# Altium PCB pcb_propeller.PcbDoc
Units mm, origin at the board's own origin, x right, y up, seen from the top; angles counter-clockwise.
Board outline 110 x 60 mm, 2 copper layers (Top Layer, Bottom Layer); 24 components, 32 nets, 115 pads, 0 vias.
Unrouted connection lines stored in the file: 2.
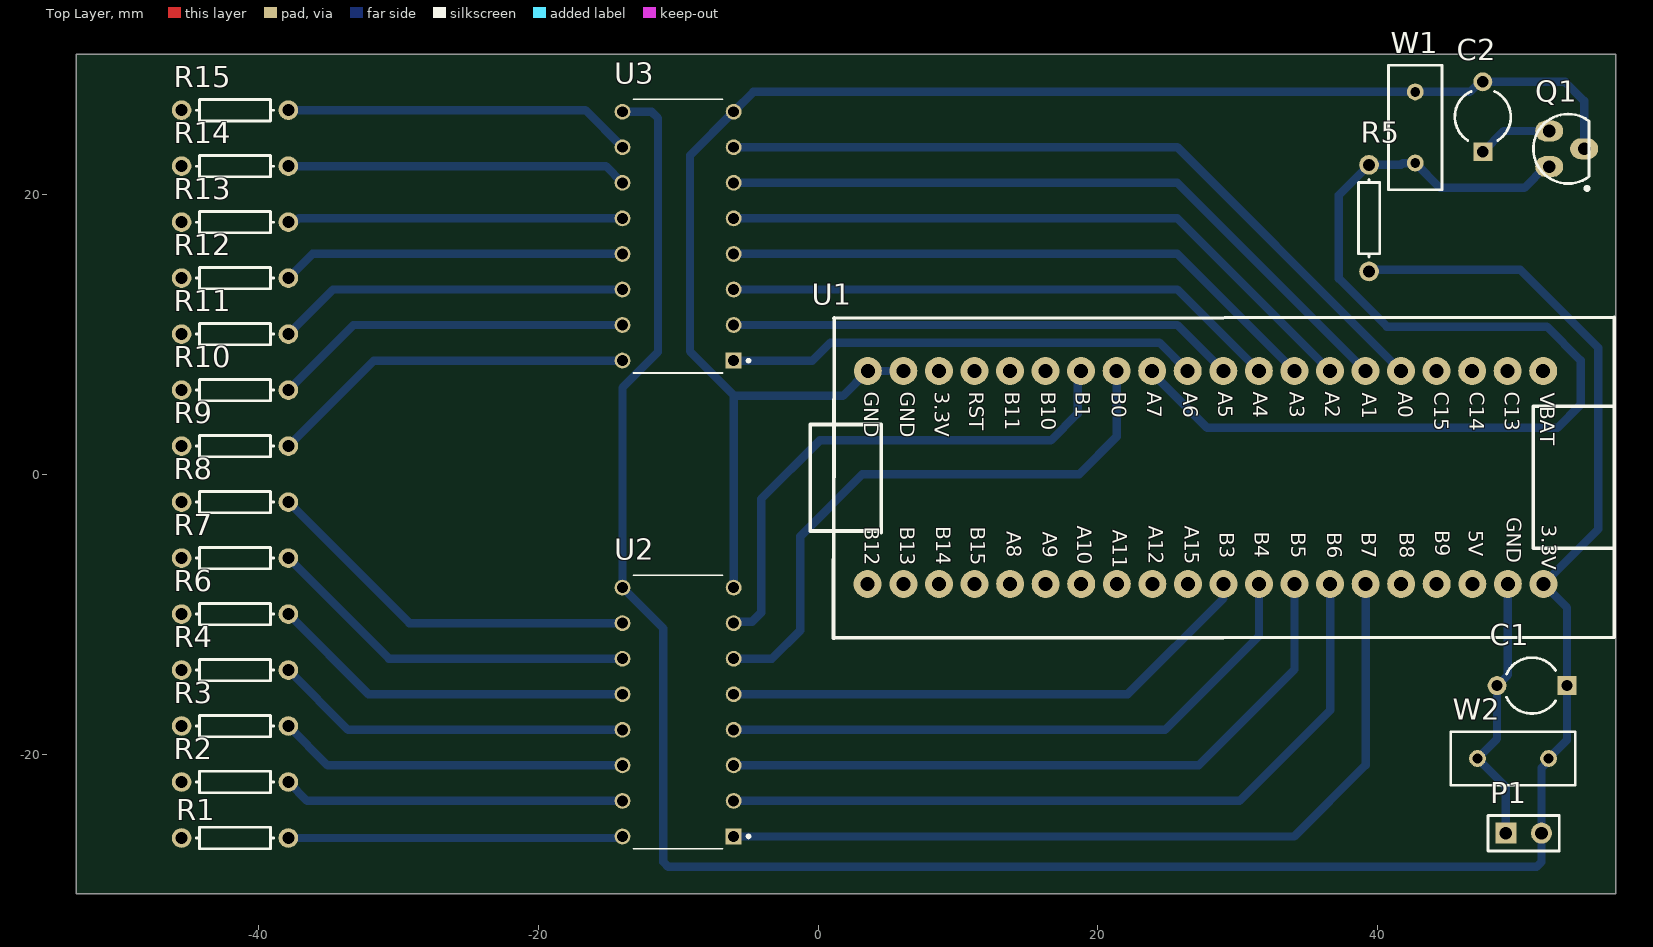
[diagram p0: Top Layer view]
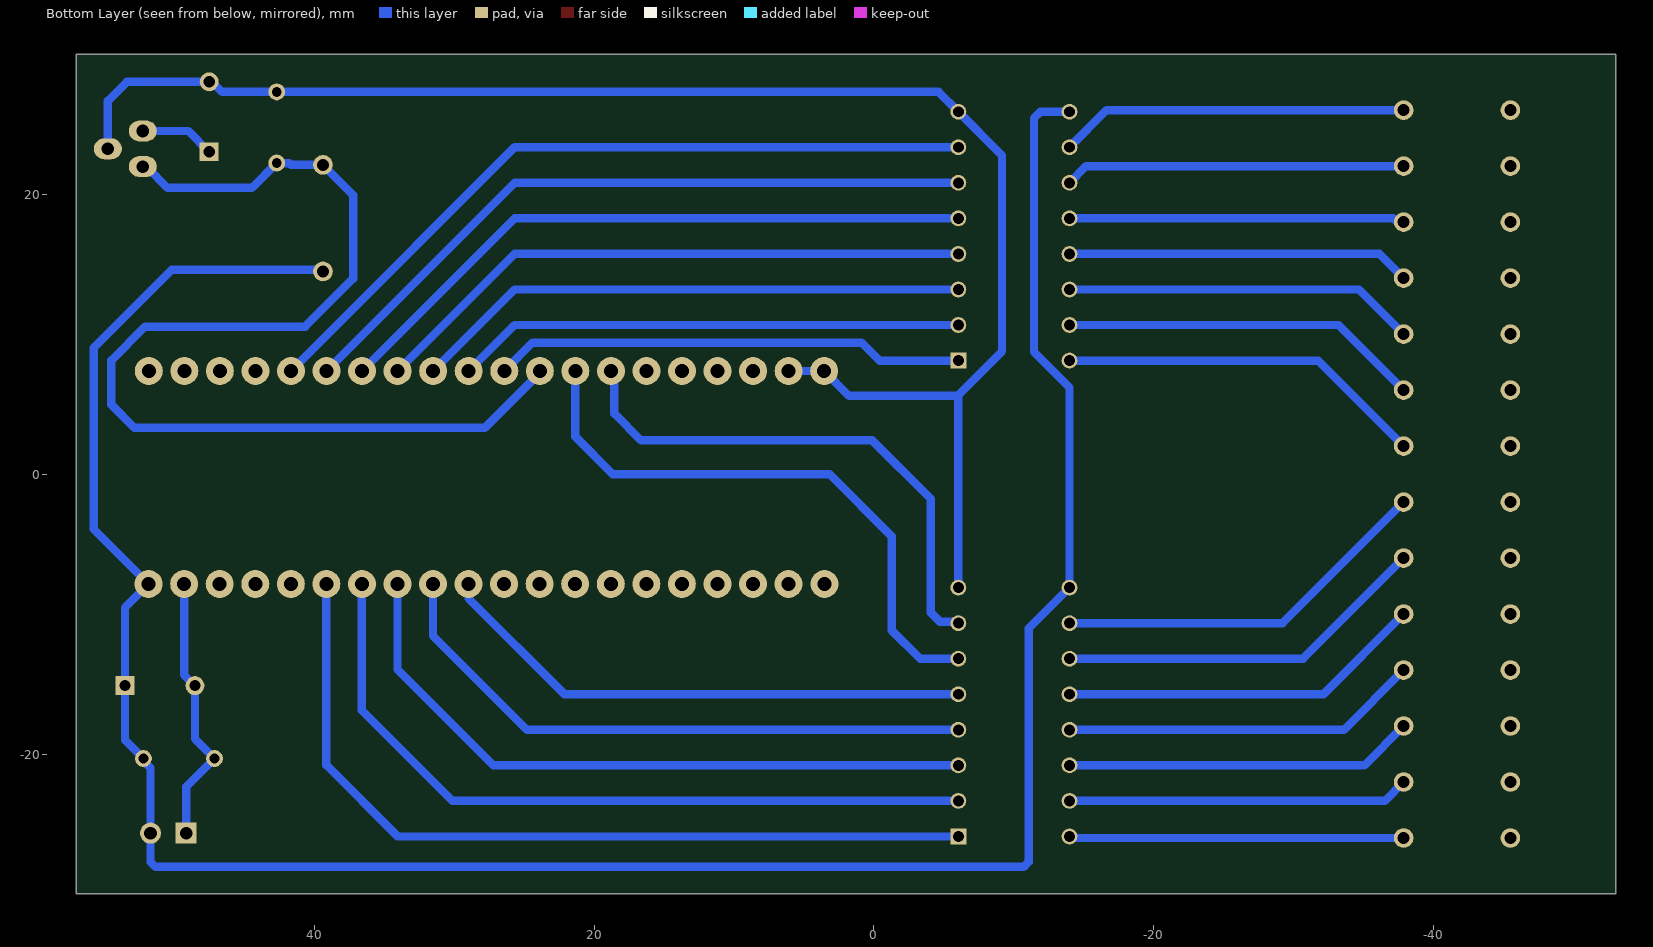
[diagram p1: Bottom Layer view, seen from below]

## Layer stack, top to bottom
Top Solder: solder mask 0.0102, Solder Resist, Dk 3.5
Top Layer: signal copper 0.0356
Dielectric 1: dielectric 0.32, FR-4, Dk 4.8
Bottom Layer: signal copper 0.0356
Bottom Solder: solder mask 0.0102, Solder Resist, Dk 3.5

## Board outline
-53,-30 -53,30 57,30 57,-30

## Design rules (kind name [scope] priority, off if disabled: settings)
Clearance [All] p1: gap=0.5 ignorepadtopadclearanceinfootprint=FALSE
PolygonConnect [All] p1: connectstyle=Relief reliefconductorwidth=0.254 reliefentries=4 polygonreliefangle="90 Angle" airgapwidth=0.254
RoutingVias [All] p1: holewidth=0.711 width=1.27 viastyle="Through Hole" minholewidth=0.711 minwidth=1.27 maxholewidth=0.711 maxwidth=1.27
SolderMaskExpansion [All] p1: expansion=0.102 istentingtop=FALSE
Width [All] p1: maxlimit=0.6 minlimit=0.6 preferedwidth=0.6
30 further rules are at their usual default settings.

## Components (designator, comment, footprint, x,y, rotation, side; value= is the part's Value field where it differs from the comment)
C1 "Cap2" CAPR5-4X5 51.014,-15.113 r180 top value=100nF
C2 "Cap2" CAPR5-4X5 47.498,25.527 r90 top value=100nF
P1 "Header 2" HDR1X2 49.149,-25.654 r0 top
Q1 "2N3904" TO-92A 53.594,23.241 r0 top
R1 "Res1" AXIAL-0.3 -41.656,-26 r180 top value=100
R2 "Res1" AXIAL-0.3 -41.656,-22 r180 top value=100
R3 "Res1" AXIAL-0.3 -41.656,-18 r180 top value=100
R4 "Res1" AXIAL-0.3 -41.656,-14 r180 top value=100
R5 "Res1" AXIAL-0.3 39.37,18.288 r270 top value=10K
R6 "Res1" AXIAL-0.3 -41.656,-10 r180 top value=100
R7 "Res1" AXIAL-0.3 -41.656,-6 r180 top value=100
R8 "Res1" AXIAL-0.3 -41.656,-2 r180 top value=100
R9 "Res1" AXIAL-0.3 -41.656,2 r180 top value=100
R10 "Res1" AXIAL-0.3 -41.656,6 r180 top value=100
R11 "Res1" AXIAL-0.3 -41.656,10 r180 top value=100
R12 "Res1" AXIAL-0.3 -41.656,14 r180 top value=100
R13 "Res1" AXIAL-0.3 -41.656,18 r180 top value=100
R14 "Res1" AXIAL-0.3 -41.656,22 r180 top value=100
R15 "Res1" AXIAL-0.3 -41.656,26 r180 top value=100
U1 "STM32F103C8T6" "Stm32 BluePill" 33.45,-0.02 r270 top
U2 "ULN2003ANE4" DIP794W45P254L1969H508Q16 -10,-17 r180 top
U3 "ULN2003ANE4" DIP794W45P254L1969H508Q16 -10,17 r180 top
W1 "Cap 10nF" RAD-0.2 42.672,24.765 r270 top
W2 "Jumper" RAD-0.2 49.657,-20.32 r0 top

## Footprints (in the part's own frame and the unit in brackets; to place one, negate y for a bottom-side part, rotate by r counter-clockwise, add the part's x,y. Pads: shape width x height; smd on the part's side, far side on the other; paste and mask are expansions set on the pad)
AXIAL-0.3 [mm] "Axial Device, Thru-Hole; 2 Leads; 0.3 in Pin Spacing"
  round 1.4 hole 0.85: 1(-3.81,0) 2(3.81,0)
  silkscreen extent -2.77,-0.76 2.77,0.76
CAPR5-4X5 [mm] "Capacitor; 2 Leads"
  rect 1.35x1.35 hole 0.8: 1(-2.5,0)
  round 1.35 hole 0.8: 2(2.5,0)
  silkscreen extent -1.69,-2 1.82,2
DIP794W45P254L1969H508Q16 [mm]
  rect 1.13x1.13 / inner round 1.13 / far side rect 1.13x1.13 hole 0.78 mask+0.102: 1(-3.97,8.89)
  round 1.13 hole 0.78 mask+0.102: 2(-3.97,6.35) 3(-3.97,3.81) 4(-3.97,1.27) 5(-3.97,-1.27) 6(-3.97,-3.81) 7(-3.97,-6.35) 8(-3.97,-8.89) 9(3.97,-8.89) 10(3.97,-6.35) 11(3.97,-3.81) 12(3.97,-1.27) 13(3.97,1.27) 14(3.97,3.81) 15(3.97,6.35) 16(3.97,8.89)
  silkscreen extent -5.13,-9.77 3.17,9.78, body extent -4.15,-9.65 4.15,9.65, height 5.08
HDR1X2 [mm] "Connector; Header; 2 Position"
  rect 1.5x1.5 hole 0.9: 1(0,0)
  round 1.5 hole 0.9: 2(2.54,0)
  silkscreen extent -1.27,-1.27 3.81,1.27
RAD-0.2 [mm] "Radial Cap, Thru-Hole; 2 Leads; 0.2 in Pin Spacing"
  round 1.2 hole 0.7: 1(-2.54,0) 2(2.54,0)
  silkscreen extent -4.44,-1.91 4.44,1.91
"Stm32 BluePill" [mm]
  round 2 hole 1: 1(7.828,-29.909) 2(7.828,-27.343) 3(7.828,-24.803) 4(7.828,-22.263) 5(7.828,-19.723) 6(7.828,-17.183) 7(7.828,-14.643) 8(7.828,-12.103) 9(7.828,-9.563) 10(7.828,-7.023) 11(7.828,-4.483) 12(7.828,-1.943) 13(7.828,0.597) 14(7.828,3.137) 15(7.828,5.677) 16(7.828,8.217) 17(7.828,10.757) 18(7.828,13.297) 19(7.828,15.837) 20(7.828,18.377) 22(-7.386,15.826) 23(-7.386,13.286) 24(-7.386,10.746) 25(-7.386,8.206) 26(-7.386,5.666) 27(-7.386,3.126) 28(-7.386,0.586) 29(-7.386,-1.954) 30(-7.386,-4.494) 31(-7.386,-7.034) 32(-7.386,-9.574) 33(-7.386,-12.114) 34(-7.386,-14.654) 35(-7.386,-17.194) 36(-7.386,-19.734) 37(-7.386,-22.274) 38(-7.386,-24.814) 39(-7.386,-27.354) 40(-7.386,-29.894) ""(-7.386,18.366)
  silkscreen extent -11.22,-34 11.69,23.43, body extent -11.18,-33.27 11.68,24.29, height 12.31
TO-92A [mm] "TO, Flat Index; 3 In-Line, Axial Leads; Body Dia. 4.5mm; Leads 0.51 x 0.48 mm (max)"
  oval 2x1.5 hole 0.9: 1(-1.355,-1.27) 2(1.145,0) 3(-1.355,1.27)
  silkscreen extent -2.48,-2.95 1.5,2.48, body extent -2.48,-2.5 1.5,2.5, height 6.86

## Part data
C1 C2: "Capacitor", PackageDescription="Capacitor; 2 Leads", PackageReference=CAPR5-4X5, Published=23-Sep-2002, Publisher="Altium Limited"
P1: "Header, 2-Pin", LatestRevisionDate=17-Jul-2002, LatestRevisionNote="Re-released for DXP Platform.", Publisher="Altium Limited"
Q1: "NPN General Purpose Amplifier", ComponentLink1Description="Manufacturer Link", ComponentLink1URL=http://www.fairchildsemi.com/, ComponentLink2Description=Datasheet, ComponentLink2URL=http://www.fairchildsemi.com/ds/2N%2F2N3904.pdf, DatasheetVersion=1997, LatestRevisionDate=15-Jan-2003, LatestRevisionNote="PCB Footprint 'BCY-W3/D4.7' replaced", PackageDescription="TO, Flat Index; 3 In-Line, Axial Leads; Body Dia. 4.5mm; Leads 0.51 x 0.48 mm (max)", PackageReference=TO-92A, PackageVersion=Sep-1998, Published=8-Jun-2000, Publisher="Altium Limited"
R1 R2 R3 R4 R5 R6 R7 R8 R9 R10 R11 R12 R13 R14 R15: "Resistor", LatestRevisionDate=17-Jul-2002, LatestRevisionNote="Re-released for DXP Platform.", PackageDescription="Axial Device, Thru-Hole; 2 Leads; 0.3 in Pin Spacing", PackageReference=AXIAL-0.3, Published=8-Jun-2000, Publisher="Altium Limited"
U1: library part BluePill, "Designed By @Alixahedi"
U2 U3: "50-V, 7-ch darlington transistor array, -20C to 70C", Package="PDIP-16 Texas Instruments", Check_prices=https://www.snapeda.com/parts/ULN2003ANE4/Texas+Instruments/view-part/?ref=eda, MF="Texas Instruments", MP=ULN2003ANE4, SnapEDA_Link=https://www.snapeda.com/parts/ULN2003ANE4/Texas+Instruments/view-part/?ref=snap
W1: library part Jumper, "Jumper Wire", LatestRevisionDate=17-Jul-2002, LatestRevisionNote="Re-released for DXP Platform.", PackageDescription="Radial Cap, Thru-Hole; 2 Leads; 0.2 in Pin Spacing", PackageReference=RAD-0.2, Published=24-Mar-1999, Publisher="Altium Limited"
W2: "Jumper Wire", LatestRevisionDate=17-Jul-2002, LatestRevisionNote="Re-released for DXP Platform.", PackageDescription="Radial Cap, Thru-Hole; 2 Leads; 0.2 in Pin Spacing", PackageReference=RAD-0.2, Published=24-Mar-1999, Publisher="Altium Limited"

## Nets (pads, with @x,y where several pads share a name; then routed paths per layer and width w, separated by ;. In a path a pad name is that pad's centre, name@x,y a point inside that pad or via, vN(x,y) a via of type N, cw(c..) or ccw(c..) an arc to the next point about the centre after c; other vN are vias at no path point)
3.3V: C1.1 P1.2 R5.2 U1.20 U1.38 U2.9 U3.9 W2.2 | length 179.8
  Bottom Layer w0.6: U3.9 -11.891,25.89 -11.43,25.43 -11.43,8.72 -13.97,6.18 U2.9 -11.049,-11.031 -11.049,-27.716 -10.698,-28.067 51.338,-28.067 51.689,-27.716 P1.2 51.689,-20.99 52.197,-20.482 W2.2 53.514,-19.003 C1.1 53.514,-9.536 U1.20 55.753,-3.922 55.753,9.017 50.165,14.605 39.37,14.605 R5.2
5V: C2.1 Q1.3 | length 5.4
  Bottom Layer w0.6: C2.1 48.982,24.511 Q1.3
GND: C1.2 C2.2 P1.1 Q1.2 U1.19 U1.39 U1.40 U2.8 U3.8 W1.1 W2.1 | length 134.6
  Bottom Layer w0.6: U2.8 -6.03,5.527 -5.969,5.588 ; U1.39 U1.40 1.778,5.588 -5.969,5.588 ; P1.1 49.149,-22.352 W2.1 48.514,-18.923 C1.2 49.287,-14.34 U1.19 ; Q1.2@54.745,23.241 Q1.2 54.739,26.668 53.38,28.027 C2.2 47.295,28.027 46.573,27.305 W1.1 -4.615,27.305 U3.8 -9.144,22.776 -9.144,8.763 -5.969,5.588
NetR1_1: R1.1 U2.16 | length 23.9
  Bottom Layer w0.6: R1.1 -14.455,-26 -14.446,-25.991 -14.071,-25.991 U2.16
NetR2_1: R2.1 U2.15 | length 24.4
  Bottom Layer w0.6: R2.1 -36.496,-23.35 U2.15
NetR3_1: R3.1 U2.14 | length 25
  Bottom Layer w0.6: R3.1 -35.036,-20.81 U2.14
NetR4_1: R4.1 U2.13 | length 25.6
  Bottom Layer w0.6: R4.1 -33.576,-18.27 U2.13
NetR6_1: R6.1 U2.12 | length 26.2
  Bottom Layer w0.6: R6.1 -32.116,-15.73 U2.12
NetR7_1: R7.1 U2.11 | length 26.9
  Bottom Layer w0.6: R7.1 -30.656,-13.19 U2.11
NetR8_1: R8.1 U2.10 | length 27.5
  Bottom Layer w0.6: R8.1 -29.196,-10.65 U2.10
NetR9_1: R9.1 U3.16 | length 26.4
  Bottom Layer w0.6: R9.1 -31.736,8.11 U3.16
NetR10_1: R10.1 U3.15 | length 25.8
  Bottom Layer w0.6: R10.1 -33.196,10.65 U3.15
NetR11_1: R11.1 U3.14 | length 25.2
  Bottom Layer w0.6: R11.1 -34.656,13.19 U3.14
NetR12_1: R12.1 U3.13 | length 24.6
  Bottom Layer w0.6: R12.1 -36.116,15.73 U3.13
NetR13_1: R13.1 U3.12 | length 24
  Bottom Layer w0.6: R13.1 -37.693,18.153 -37.212,18.153 -37.095,18.27 U3.12
NetR14_1: R14.1 U3.11 | length 24.4
  Bottom Layer w0.6: R14.1 -15.16,22 U3.11
NetR15_1: R15.1 U3.10 | length 25
  Bottom Layer w0.6: R15.1 -16.62,26 U3.10
NetU1_11: U1.11 U2.5 | length 38.9
  Bottom Layer w0.6: U2.5 22.127,-15.73 28.967,-8.89 U1.11
NetU1_12: U1.12 U2.4 | length 44
  Bottom Layer w0.6: U2.4 24.79,-18.27 31.507,-11.554 U1.12
NetU1_13: U1.13 U2.3 | length 49
  Bottom Layer w0.6: U2.3 27.196,-20.81 34.047,-13.959 U1.13
NetU1_14: U1.14 U2.2 | length 54.3
  Bottom Layer w0.6: U2.2 30.117,-23.35 36.587,-16.88 U1.14
NetU1_15: U1.15 U2.1 | length 60.2
  Bottom Layer w0.6: U2.1 34.029,-25.89 39.127,-20.792 U1.15
NetU1_25: U1.25 U3.7 | length 54.3
  Bottom Layer w0.6: U3.7 25.672,23.35 39.856,9.166 39.862,9.166 41.656,7.372 U1.25
NetU1_26: U1.26 U3.6 | length 50.7
  Bottom Layer w0.6: U3.6 25.678,20.81 39.116,7.372 U1.26
NetU1_27: U1.27 U3.5 | length 47.1
  Bottom Layer w0.6: U3.5 25.678,18.27 36.576,7.372 U1.27
NetU1_28: U1.28 U3.4 | length 43.5
  Bottom Layer w0.6: U3.4 25.678,15.73 34.036,7.372 U1.28
NetU1_29: U1.29 U3.3 | length 39.9
  Bottom Layer w0.6: U3.3 25.678,13.19 31.496,7.372 U1.29
NetU1_30: U1.30 U3.2 | length 36.4
  Bottom Layer w0.6: U3.2 25.678,10.65 28.829,7.499 28.829,7.366 U1.30
NetU1_31: U1.31 U3.1 | length 33.8
  Bottom Layer w0.6: U3.1 -0.399,8.11 0.889,9.398 24.39,9.398 26.416,7.372 U1.31
NetU1_33: U1.33 U2.6 | length 42.6
  Bottom Layer w0.6: U2.6 -3.284,-13.19 -1.27,-11.176 -1.27,-4.445 3.175,0 18.669,0 21.336,2.667 U1.33
NetU1_34: U1.34 U2.7 | length 38.7
  Bottom Layer w0.6: U2.7 -5.929,-10.549 -4.707,-10.549 -4.064,-9.906 -4.064,-1.778 0.127,2.413 16.637,2.413 18.545,4.321 18.545,7.115 U1.34
OUT_Hall: Q1.1 R5.1 U1.32 W1.2 | length 79.2
  Bottom Layer w0.6: U1.32 23.876,7.239 27.813,3.302 52.832,3.302 54.483,4.953 54.483,8.128 52.07,10.541 40.64,10.541 37.211,13.97 37.211,19.939 R5.1 41.656,22.098 41.767,22.209 42.656,22.209 W1.2 44.45,20.447 50.465,20.447 51.989,21.971 Q1.1
pads on no net: R1.2 R2.2 R3.2 R4.2 R6.2 R7.2 R8.2 R9.2 R10.2 R11.2 R12.2 R13.2 R14.2 R15.2 U1. U1.1 U1.2 U1.3 U1.4 U1.5 U1.6 U1.7 U1.8 U1.9 U1.10 U1.16 U1.17 U1.18 U1.22 U1.23 U1.24 U1.35 U1.36 U1.37

## Silkscreen, mask and mechanical layers (free items; w line width, h text height)
Mechanical 1:
  the board outline again, w0.254

## Text inside footprints (layer, text, board x,y; h text height)
U1: Top Overlay "5V" at 46.144,-4.013 h1.78 r270; Top Overlay "B9" at 43.731,-4.013 h1.78 r270; Top Overlay "B8" at 41.191,-4.14 h1.78 r270; Top Overlay "3.3V" at 51.351,-3.632 h1.78 r270; Top Overlay "GND" at 48.837,-3.068 h1.78 r270; Top Overlay "A5" at 28.237,5.893 h1.78 r270; Top Overlay "A2" at 35.888,5.893 h1.78 r270; Top Overlay "A3" at 33.343,5.893 h1.78 r270; Top Overlay "A4" at 30.758,5.893 h1.78 r270; Top Overlay "RST" at 10.457,5.893 h1.78 r270; Top Overlay "B10" at 15.588,5.893 h1.78 r270; Top Overlay "B11" at 13.003,5.893 h1.78 r270; Top Overlay "A6" at 25.748,5.893 h1.78 r270; Top Overlay "A7" at 23.163,5.893 h1.78 r270; Top Overlay "B0" at 20.617,5.893 h1.78 r270; Top Overlay "B1" at 18.058,5.893 h1.78 r270; Top Overlay "3.3V" at 7.994,5.893 h1.78 r270; Top Overlay "B15" at 10.559,-3.769 h1.78 r270; Top Overlay "A8" at 13.124,-4.077 h1.78 r270; Top Overlay "A11" at 20.699,-3.993 h1.78 r270; Top Overlay "B3" at 28.339,-4.14 h1.78 r270; Top Overlay "A9" at 15.69,-4.107 h1.78 r270; Top Overlay "A15" at 25.85,-3.706 h1.78 r270; Top Overlay "A12" at 23.265,-3.706 h1.78 r270; Top Overlay "A10" at 18.179,-3.706 h1.78 r270; Top Overlay "VBAT" at 51.23,5.82 h1.78 r270; Top Overlay "B5" at 33.444,-4.14 h1.78 r270; Top Overlay "B14" at 8.075,-3.739 h1.78 r270; Top Overlay "B7" at 38.479,-4.14 h1.78 r270; Top Overlay "B4" at 30.859,-4.107 h1.78 r270; Top Overlay "B6" at 36.01,-4.171 h1.78 r270; Top Overlay "C15" at 43.655,5.893 h1.78 r270; Top Overlay "C13" at 48.71,5.893 h1.78 r270; Top Overlay "C14" at 46.221,5.893 h1.78 r270; Top Overlay "A0" at 41.09,5.893 h1.78 r270; Top Overlay "A1" at 38.53,5.822 h1.78 r270; Top Overlay "GND" at 5.504,5.893 h1.78 r270; Top Overlay "B13" at 5.504,-3.759 h1.78 r270; Top Overlay "GND" at 2.939,5.893 h1.78 r270; Top Overlay "B12" at 2.995,-3.769 h1.78 r270